# EAGLE board portable_FM_DIP (EAGLE 6.4)
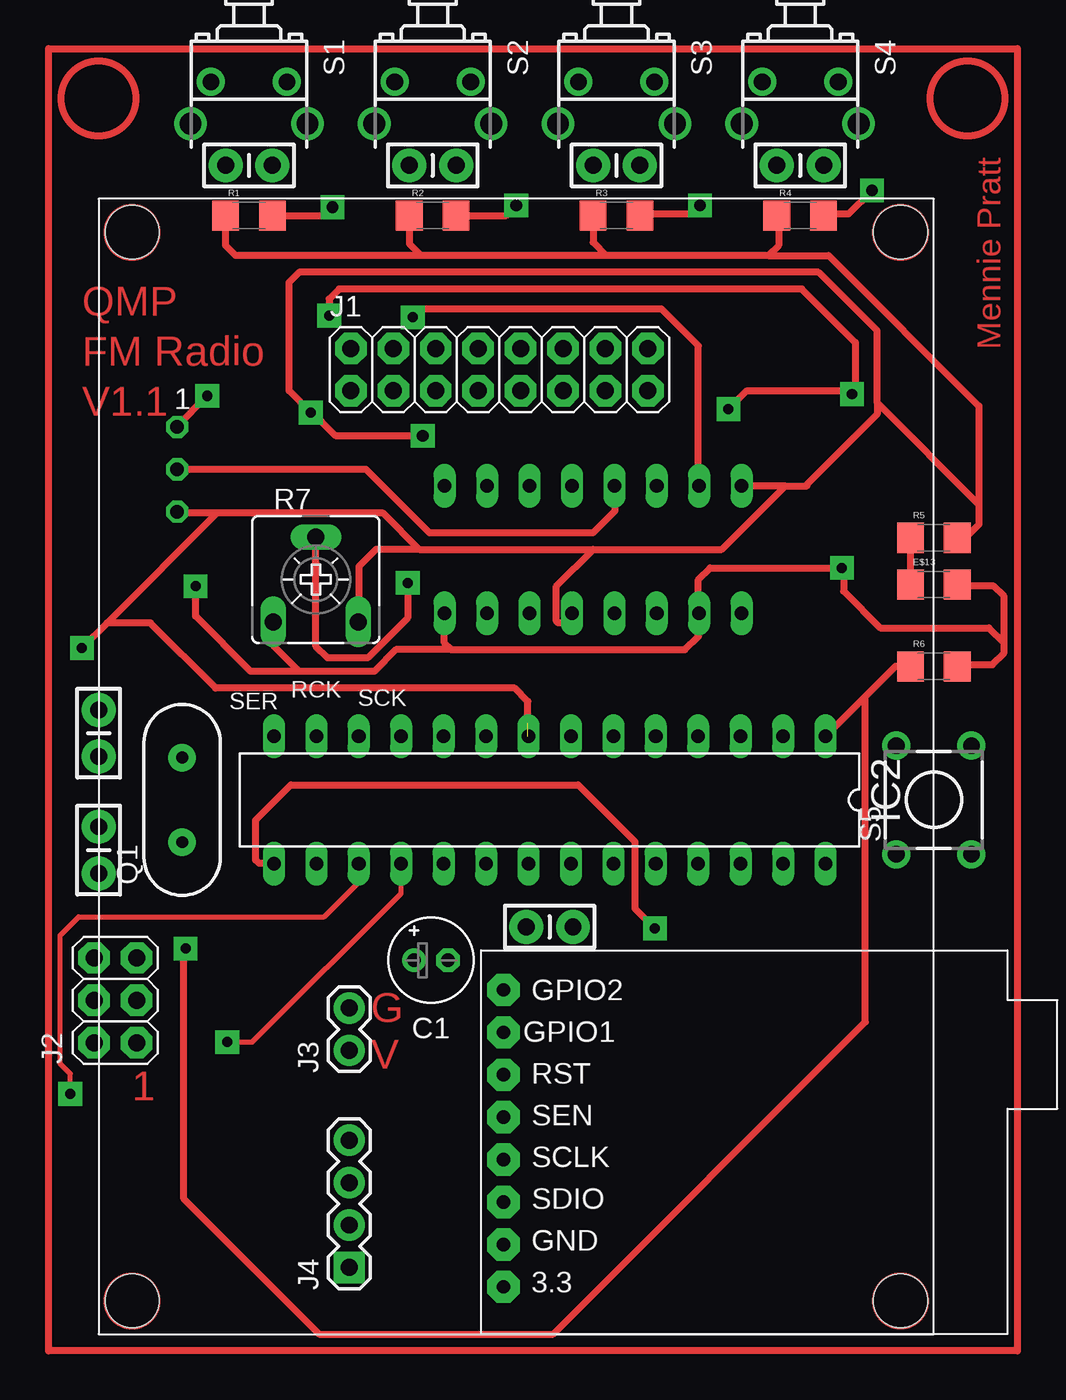
[diagram p0: board, top side]
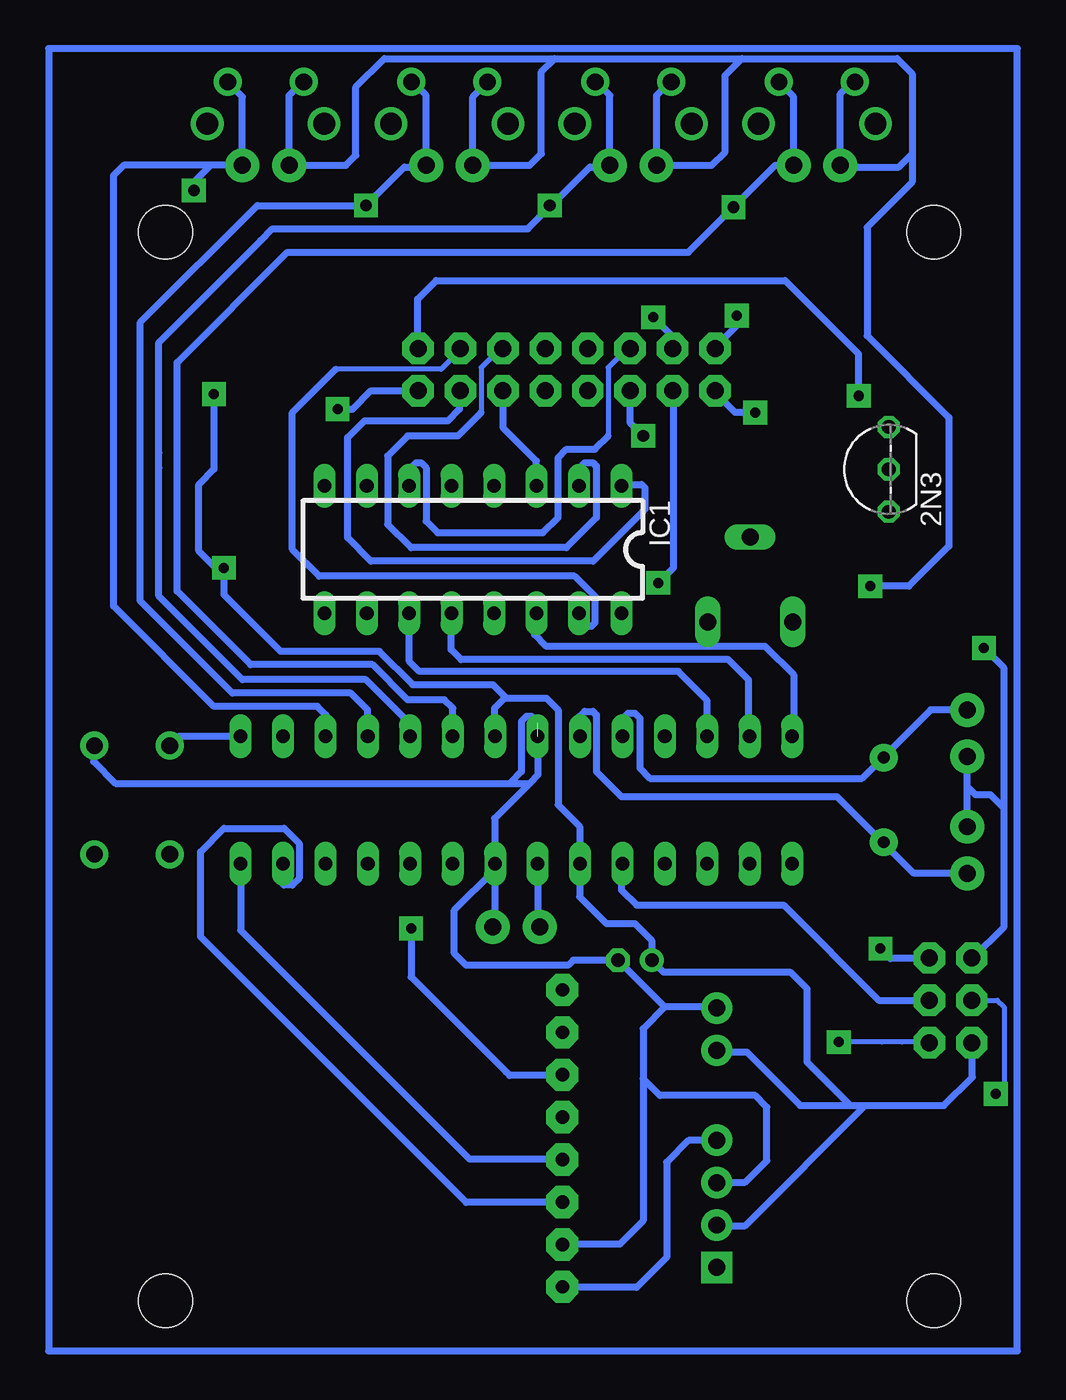
[diagram p1: board, bottom side, seen from below]

No outline drawn. Coordinates in mm, seen from the top.
Copper layers (1*16): Top 0.035mm / dielectric 1.5mm / Bottom 0.035mm
Design rules "default": minimum track width 10mil, minimum drill 24mil, track to track 38mil, track to pad 38mil, pad to pad 38mil, via to via 38mil, smd to smd 38mil, copper to edge 40mil, drill to drill 8mil, minimum pad ring 10mil, minimum via ring 8mil, stop-mask expansion 4mil, vias tented up to drill 0mil, thermal gap 10mil

## Footprints (pad centres in the part's own frame; a part is rotated, then mirrored left to right if it is on the bottom)
TO92- = drill 0.813 octagon: 1 -2.54,0; 2 0,0; 3 2.54,0
E2-5 = drill 0.813 pad 1.422: + -1.016,0 | drill 0.813 pad 1.422 octagon: - 1.016,0
CAP-PTH-SMALL-KIT = drill 1.016 pad 2.032: 1 -1.397,0; 2 1.397,0
LIPO_RIDER_PRO = hole 3.2: -23,-32; -23,32; 23,32; 23,-32
1206 = smd 1.6 x 1.8: 1 -1.4,0; 2 1.4,0
SI4703_MODULE = drill 0.8 pad 1.93 octagon: P$1 -10.16,10.16; P$2 -7.62,10.16; P$3 -5.08,10.16; P$4 -2.54,10.16; P$5 0,10.16; P$6 2.54,10.16; P$7 5.08,10.16; P$8 7.62,10.16
DIL16 = drill 0.813 long: 1 -8.89,-3.81; 2 -6.35,-3.81; 3 -3.81,-3.81; 4 -1.27,-3.81; 5 1.27,-3.81; 6 3.81,-3.81; 7 6.35,-3.81; 8 8.89,-3.81; 9 8.89,3.81; 10 6.35,3.81; 11 3.81,3.81; 12 1.27,3.81; 13 -1.27,3.81; 14 -3.81,3.81; 15 -6.35,3.81; 16 -8.89,3.81
DIL28-3 = drill 0.813 long: 1 -16.51,-3.81; 2 -13.97,-3.81; 3 -11.43,-3.81; 4 -8.89,-3.81; 5 -6.35,-3.81; 6 -3.81,-3.81; 7 -1.27,-3.81; 8 1.27,-3.81; 9 3.81,-3.81; 10 6.35,-3.81; 11 8.89,-3.81; 12 11.43,-3.81; 13 13.97,-3.81; 14 16.51,-3.81; 15 16.51,3.81; 16 13.97,3.81; 17 11.43,3.81; 18 8.89,3.81; 19 6.35,3.81; 20 3.81,3.81; 21 1.27,3.81; 22 -1.27,3.81; 23 -3.81,3.81; 24 -6.35,3.81; 25 -8.89,3.81; 26 -11.43,3.81; 27 -13.97,3.81; 28 -16.51,3.81
2X8 = drill 1.016 pad 1.88 octagon: 1 0,0; 2 0,2.54; 3 2.54,0; 4 2.54,2.54; 5 5.08,0; 6 5.08,2.54; 7 7.62,0; 8 7.62,2.54; 9 10.16,0; 10 10.16,2.54; 11 12.7,0; 12 12.7,2.54; 13 15.24,0; 14 15.24,2.54; 15 17.78,0; 16 17.78,2.54
2X03 = drill 1.016 pad 1.88 octagon: 1 -2.54,-1.27; 2 -2.54,1.27; 3 0,-1.27; 4 0,1.27; 5 2.54,-1.27; 6 2.54,1.27
1X02 = drill 1.016 pad 1.88: 1 0,0; 2 2.54,0
1X04 = drill 1.016 pad 1.88 square: 1 0,0 | drill 1.016 pad 1.88: 2 2.54,0; 3 5.08,0; 4 7.62,0
HC49US = drill 0.7 pad 1.651: 1 -2.54,0; 2 2.54,0
CA6V = drill 1.016 long: A -2.54,-2.54; E 2.54,-2.54; S 0,2.54
TL1105JA = drill 1 pad 1.676: 1 -2.275,0; 2 2.275,0 | drill 1.3 pad 1.9: 3 -3.5,2.5; 4 3.5,2.5
TL1105 = drill 1 pad 1.676: 1 -2.25,3.25; 2 2.25,3.25; 3 -2.25,-3.25; 4 2.25,-3.25

## Placement (x,y rotation side)
2N3  2N7000  [TO92-]  7.7,52.8 90 bottom
C1  [E2-5]  22.9,23.4 0 top
C2  0.1uF  [CAP-PTH-SMALL-KIT]  12,71 0 top
C3  0.1uF  [CAP-PTH-SMALL-KIT]  23,71 0 top
C4  0.1uF  [CAP-PTH-SMALL-KIT]  34,71 0 top
C5  0.1uF  [CAP-PTH-SMALL-KIT]  45,71 0 top
C6  0.1uF  [CAP-PTH-SMALL-KIT]  30,25.4 0 top
C7  22pF  [CAP-PTH-SMALL-KIT]  3,37 90 top
C8  22pF  [CAP-PTH-SMALL-KIT]  3,30 90 top
E$5  [LIPO_RIDER_PRO]  28,35 0 top
E$13  [1206]  53,45.9 0 top
E$27  Si4703 Evaluation Board  [SI4703_MODULE]  37.4,14 90 top
IC1  [DIL16]  32.6,48 180 bottom
IC2  [DIL28-3]  30,33 180 top
J1  LCD HD44780 8x2  [2X8]  18.1,57.5 0 top
J2  2x3 ICSP Male  [2X03]  4,21 90 top
J3  VIN From Lipo Rider  [1X02]  18,18 90 top
J4  Pololu Variable reg 3.3V Out  [1X04]  18,5 90 top
Q1  [HC49US]  8,33 90 top
R1  10K  [1206]  12,68 0 top
R2  10K  [1206]  23,68 0 top
R3  10K  [1206]  34,68 0 top
R4  10K  [1206]  45,68 0 top
R5  330  [1206]  53,48.7 0 top
R6  10K  [1206]  53,41 0 top
R7  10K  [CA6V]  16,46.2 0 top
S1  Menu  [TL1105JA]  12,76 180 top
S2  Select  [TL1105JA]  23,76 180 top
S3  Up  [TL1105JA]  34,76 180 top
S4  Down  [TL1105JA]  45,76 180 top
S5  [TL1105]  53,33 0 top

## Library data of the parts
2N3 = maxim
C1 = adafruit
C2-C8 E$13 IC1 J1-J4 Q1 R1-R6 = SparkFun
E$5 E$27 = Quinton
IC2 = atmel
R7 = pot
S1-S5 = switch

## Nets
GND: R2.1 R3.1 R5.2
S$7: R5.1
S$10: R6.1
S$11: R2.2
S$52: J1.11
S$57: 2N3.2

## Tracks (layer width: path | path; a pad name or v marks a point on that pad's centre or on a via)
GND  (via drill 0.6 pad 1.42)  (1 unrouted)
  Top 0.406: 28.7,36.8 28.7,38.9 27.9,39.7 10,39.7 6.1,43.6 3.5,43.6 | 45.3,51.8 45.4,51.8 | 44.1,51.8 41.5,51.8 | 44.1,51.8 45.3,51.8 | 44.1,51.8 40.3,48 32.6,48 | 22.2,48 32.6,48 | 22.2,48 20,50.2 10.1,50.2 | 7.8,50.2 10.1,50.2 | 45.3,51.8 49.6,56.1 49.6,56.8 | v15.7,56.2 14.4,57.5 14.4,64 15,64.6 46.1,64.6 49.6,61.1 49.6,56.8 | 43.7,68 43.7,66.2 43.1,65.6 | 43.1,65.6 33.4,65.6 | 33.4,65.6 22.3,65.6 | 22.3,65.6 11.2,65.6 10.6,66.2 10.6,67.8 | R2.1 21.6,66.3 22.3,65.6 | R3.1 32.6,66.4 33.4,65.6 | 43.1,65.6 46.7,65.6 55.7,56.6 55.7,50.7 | 55.7,50.7 55.7,49.5 54.9,48.7 R5.2 | 49.6,56.8 55.7,50.7 | 22.2,48 19.6,48 18.6,47 18.6,43.6 | 10.1,50.2 3.5,43.6 | 3.5,43.6 v2,42.1 | 32.6,48 30.4,45.8 30.4,43.7 30.5,43.6 31.2,43.6 31.3,43.7 31.3,44.2
  Bottom 0.406: v15.7,56.2 16.9,56.2 18.1,57.4 | 2.8,23.5 2.7,23.5 0.8,25.4 0.8,32.5 | 0.8,32.5 1.6,33.3 2.5,33.3 3,33.8 | 3,31.4 3,33.8 | 3,33.8 3,35.6 | 0.8,32.5 0.8,40.9 v2,42.1 | 18,10.1 16.3,10.1 15,11.4 15,14.6 15.7,15.3 21.4,15.3 22.4,16.3 | 21.1,20.6 22.4,19.3 22.4,16.3 | 22.4,16.3 22.4,7.8 23.8,6.4 27.2,6.4 | 18,20.6 21.1,20.6 | 21.1,20.6 23.9,23.4 26.6,23.4 26.9,23.1 33,23.1 33.7,23.8 33.7,26.4 31.3,28.8 | 55.3,36.3 55.3,35.3 54,34 30.4,34 | 30.4,34 29.2,34 | 29.2,34 28.7,34.5 28.7,37.6 29.1,38 29.4,38 29.7,37.7 29.7,34.7 30.4,34 | 29.2,34 31.3,31.9 31.3,28.8 | 31.3,28.8 31.3,25.5 31.4,25.4
S$1
  Bottom 0.406: 0,0 0,78 58,78 58,0 0,0
S$2
  Bottom 0.406: 18,12.6 19.7,12.6 21,11.3 21,5.6 22.8,3.8 27.3,3.8
S$4
  Bottom 0.305: 30.8,60 31,60 32.1,58.9 32.1,56.2
  Bottom 0.406: 32.1,56.2 33.5,54.8 36.5,54.8 37.7,53.6 37.7,49.5 36.3,48.1 27,48.1 25.2,49.9 25.2,53 25.4,53.2 25.9,53.2 26.2,52.9 26.2,52.7 26.2,52.5 26.2,51.8
S$5  (via drill 0.6 pad 1.42)
  Top 0.406: 13.5,29.2 12.6,29.2 12.4,29.4 12.4,31.8 14.5,33.9 31.7,33.9 35.1,30.5 35.1,26.5 v36.3,25.3
  Bottom 0.406: v36.3,25.3 36.3,22.4 30.6,16.7 30.4,16.5 27.2,16.5
S$6
  Bottom 0.406: 32.6,71 32.6,75.1 31.7,76
S$7
  Top 0.406: R5.1 51.6,46.2
S$8
  Top 0.406: 16,47.2 16,48.1
S$9
  Bottom 0.406: 23.8,51.9 22.5,51.9 22.3,51.7 22.3,50.4 25.4,47.3 38.7,47.3 40.1,48.7 40.1,54.7 39.1,55.7 34.1,55.7 33.4,56.4 33.4,57.5
S$10  (via drill 0.6 pad 1.42)
  Top 0.305: 8.1,24 v8.2,24.1
  Top 0.406: 8.1,24 8.1,9.1 16.2,1 30.2,1 48.9,19.7 48.9,39.2 | R6.1 50.7,41 48.9,39.2 | 48.9,39.2 46.5,36.8
  Bottom 0.406: 5.3,23.5 7.6,23.5 v8.2,24.1
S$11  (via drill 0.7 pad 1.42)
  Top 0.406: R2.2 27.4,68 v28,68.6
S$12  (via drill 0.7 pad 1.42)
  Top 0.406: 35.4,68.1 38.5,68.1 v39,68.6
  Bottom 0.406: 38.9,36.8 38.9,38.4 39.9,39.4 47,39.4 52.5,44.9 52.5,61.6 45.5,68.6 v39,68.6 36.7,70.9 35.5,70.9 35.4,71 35.4,75.2 36.3,76.1
S$14
  Bottom 0.406: 46.5,36.8 50.2,36.8 50.7,36.3
S$16
  Top 0.406: 0,78 58,78 58,0 0,0 0,78
S$17  (via drill 0.7 pad 1.42)
  Top 0.406: 46.5,68.1 47.9,68.1 v49.3,69.5
  Bottom 0.406: 41.4,36.8 41.4,38.1 41.9,38.6 48.1,38.6 54.1,44.6 54.1,70.4 53.5,71 48.3,71 | 47.3,76 46.4,75.1 46.4,71 48.3,71 | v49.3,69.5 49.3,70 48.3,71
S$18
  Bottom 0.406: 23.7,36.9 23.7,37.8 23.3,38.2 22.9,38.2 22.6,37.9 22.6,34.9 22,34.3 9.3,34.3 5.2,38.4 3,38.4
S$19
  Bottom 0.406: 26.2,36.9 26.2,38 25.9,38.3 25.4,38.3 25.2,38.1 25.2,34.7 23.7,33.2 10.8,33.2 6.2,28.6 3,28.6
S$20  (via drill 0.7 pad 1.42)
  Top 0.406: v22.4,54.8 17.2,54.8 15.6,56.4
  Bottom 0.406: 23.2,57.5 23.2,55.6 v22.4,54.8
S$21
  Bottom 0.406: 27.2,8.9 33,8.9 48.9,24.8 48.9,29.9 47.5,31.3 43.9,31.3 43,30.4 43,28.3 43.4,27.9 43.9,27.9 44,28 44,29.2
S$22
  Bottom 0.406: 28.7,29.2 28.7,25.5 28.6,25.4
S$23  (via drill 0.6 pad 1.42)
  Top 0.406: v40.7,56.4 41.8,57.5 47.9,57.5 v48.1,57.3 48.3,57.5 48.3,60.4 45.1,63.6 17.4,63.6 16.8,63 v16.8,62 | v47.5,46.9 39.6,46.9 38.9,46.2 38.9,44.2
  Bottom 0.406: 35.9,57.5 38.7,57.5 39.8,56.4 v40.7,56.4 | v48.1,57.3 48.1,52.8 49,51.9 49,47.9 48,46.9 v47.5,46.9 47.5,45.3 44.1,41.9 38.2,41.9 36.2,39.9 31.4,39.9 30.6,39.1 | v16.8,62 16.8,61.4 18.1,60.1 | 31.3,36.8 31.3,38.5 30.7,39.1 30.6,39.1 | 30.6,39.1 28.2,39.1 27.5,38.4 27.5,32.7 26.2,31.4 26.2,27.2 24.6,25.6 22.9,25.6 21.9,24.6 21.9,23.4 21.2,22.7 13.6,22.7 12.6,21.7 12.6,17.3 10,14.7 | 18,17.9 16.2,17.9 13,14.7 10,14.7 | 2.7,18.5 2.7,16.4 4.4,14.7 9.1,14.7 | 10,14.7 9.1,14.7 | 18,7.5 16.3,7.5 9.1,14.7
S$24
  Bottom 0.305: 23.1,57.5 23.1,57.6
S$25
  Bottom 0.406: 5.3,21 8.3,21 14,26.7 22.8,26.7 23.7,27.6 23.7,29.2
S$26
  Top 0.406: 47.6,46.9 47.6,45.5 49.8,43.3 56.3,43.3 57.2,42.4 | 54.4,41.1 56.5,41.1 57.2,41.8 57.2,42.4 | 57.2,42.4 57.2,45.2 56.6,45.8 54.3,45.8
S$27
  Bottom 0.406: 27.2,11.5 32.8,11.5 46.5,25.2 46.5,29.2
S$30  (via drill 0.7 pad 1.42)
  Top 0.406: 13.5,68 16.5,68 v17,68.5
  Bottom 0.406: 33.8,36.8 33.8,38.5 34.3,39 36.5,39 38.6,41.1 45.9,41.1 50.3,45.5 50.3,59.2 43.7,65.8 19.7,65.8 v17,68.5 14.5,71 13.4,71 13.4,75.1 14.3,76
S$31  (via drill 0.6 pad 1.42)
  Top 0.406: 38.9,44.1 38.9,42.8 38.1,42 24.1,42 | 23.7,44.2 23.7,42.4 24.1,42 | 8.8,44.9 v8.8,45.8 8.8,44 12.1,40.7 15,40.7 | 24.1,42 20.8,42 19.5,40.7 15,40.7 | 13.5,43.7 13.5,42.2 15,40.7
  Bottom 0.406: 32.7,71 29.2,71 28.5,71.7 28.5,76.6 27.7,77.4 | 20.8,76 21.6,75.2 21.6,71 18.3,71 17.5,71.8 17.5,76.4 16.5,77.4 | 9.8,76.1 10.6,75.3 10.6,70.9 7.1,70.9 6.3,71.7 | 42.8,76 43.6,75.2 43.6,71 40.2,71 39.6,71.6 39.6,75.7 37.9,77.4 27.7,77.4 | 27.7,77.4 16.5,77.4 | 16.5,77.4 7.2,77.4 6.3,76.5 6.3,71.7 | v8.8,45.8 6.5,45.8 4.1,48.2 4.1,55.9 9,60.8 9,67.3 6.3,70 6.3,71.7
S$45
  Bottom 0.406: 36.4,36.7 36.4,37.6 39,40.2 46.4,40.2 51.4,45.2 51.4,52.9 51.4,53.8 51.4,60.4 45.7,66.1 45.3,66.5 44.6,67.2 29.3,67.2 25.6,70.9 24.5,70.9 24.4,71 24.4,75.2 25.3,76.1
S$48  (via drill 0.6 pad 1.42)
  Top 0.305: v10.7,18.5 12.2,18.5 21.1,27.4 21.1,29.2
  Bottom 0.305: 5.3,18.5 6.9,18.5 8.1,18.5 v10.7,18.5
S$50  (via drill 0.6 pad 1.42)
  Top 0.305: v1.3,15.4 1.3,16.6 0.7,17.2 0.7,24.9 1.8,26 16.5,26 18.6,28.1 18.6,29.2
  Bottom 0.305: 2.8,21 1.2,21 0.8,20.6 0.8,15.9 v1.3,15.4
S$52
  Bottom 0.406: 28.8,51.8 28.8,53.3 30.8,55.3 J1.11
S$53
  Bottom 0.406: 36.4,44.2 36.4,41.3 35.8,40.7 20.3,40.7 18.6,39 18.6,36.8
S$54
  Bottom 0.406: 28.8,44.2 28.9,44.1 28.9,42.9 28.2,42.2 15.1,42.2 13.4,40.5 13.4,36.9 13.5,36.8
S$56
  Bottom 0.406: 33.9,44.2 33.9,42 33.3,41.4 17.3,41.4 16.1,40.2 16.1,37 16,36.9
S$57
  Top 0.406: 33.9,51.8 33.9,50.3 32.6,49 22.8,49 19.5,52.3 19,52.8 2N3.2
S$60  (via drill 0.6 pad 1.42)
  Top 0.406: v21.5,46 21.5,43.9 19.1,41.5 16.7,41.5 16,42.2 16,48.7
  Bottom 0.406: 20.6,57.5 20.6,46.9 v21.5,46
S$61  (via drill 0.6 pad 1.42)
  Top 0.406: 38.9,51.8 38.9,60.2 36.7,62.4 22.3,62.4 v21.8,61.9 21.9,62
  Bottom 0.406: v21.8,61.9 20.7,60.8 20.7,60
S$63
  Bottom 0.305: 23.2,60 23.4,60 24.5,58.9 24.5,54.8
  Bottom 0.406: 24.5,54.8 25.3,54 27,54 27.5,53.5 27.5,49.9 28.4,49 34.7,49 35.4,49.7 35.4,52.9 35.7,53.2 36,53.2 36.2,53 36.4,52.8 36.4,51.8
S$64
  Bottom 0.305: 33.3,60 34.5,58.8 40.8,58.8
  Bottom 0.406: 40.8,58.8 43.4,56.2 43.4,48 41.8,46.4 26.5,46.4 25.3,45.2 25.3,43.6 25.5,43.4 26.1,43.4 26.2,43.5 26.2,44.3
S$67
  Bottom 0.406: 7.8,55.5 7.7,55.4
S$68  (via drill 0.6 pad 1.42)
  Top 0.406: 7.7,55.4 v9.5,57.2
  Bottom 0.406: 35.9,60.1 35.9,63 34.8,64.1 13.9,64.1 9.5,59.7 v9.5,57.2
(copper drawn outside any net)
  shapes: Top circle x6

## Text on the board
Top: QMP | Mennie Pratt | FM Radio | V1.1 | G | V | 1
tPlace: 1 | RCK | SCK | SER
tNames: R7 - potentiometer 10K 1 turn | R1, R2, R3, R4, R6 - 10K | R5 - 330 | C2, C3, C4, C5, C6 - 0.1uF | C7, C8 - 22pF | C1 - 100uF 25V | IC1 - 74HC595 | IC2 - ATMEGA328P-PU | Q1 - 16MHz | S1, S2, S3, S4 - mom. right 9mm | S5 - mom. 4mm vert. | J1 - LCD HD44780 8x2 | J2 - 2x3 ICSP Male Header | J3 - JST 2.5mm Vertical